# EAGLE board X04A-015-B (EAGLE 6.3)
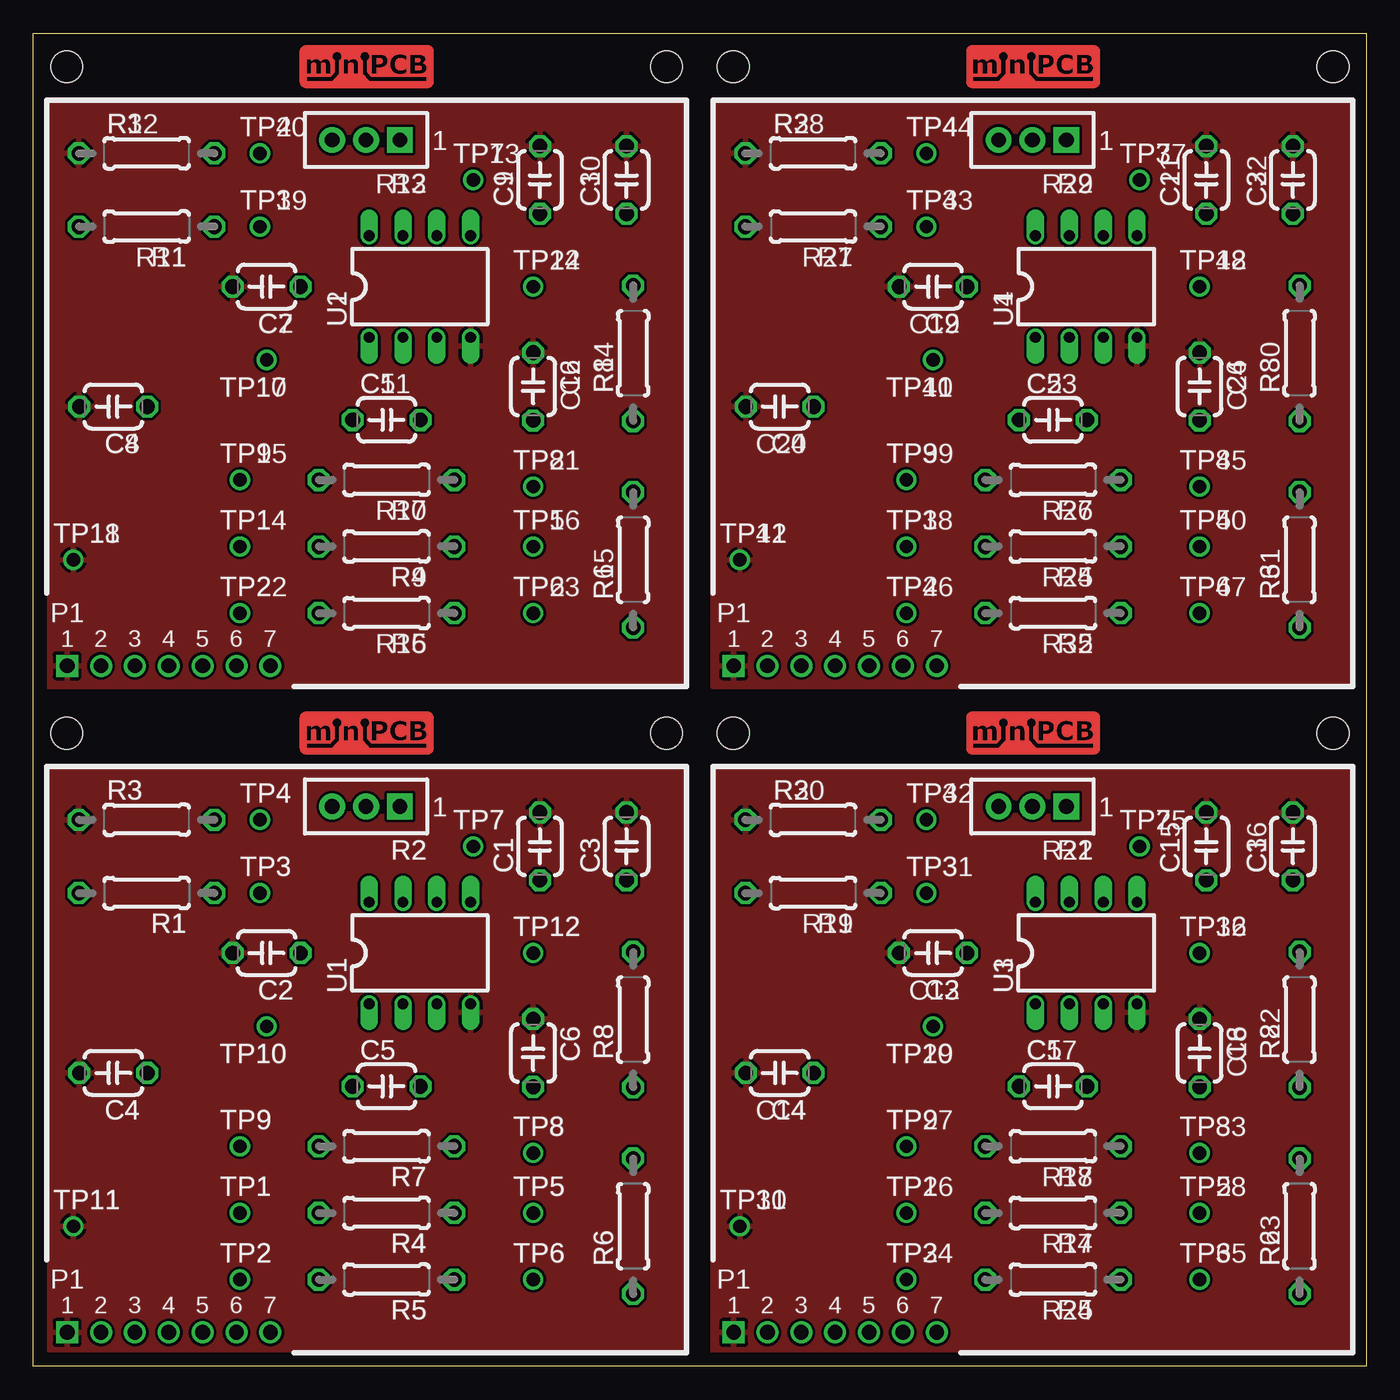
[diagram p0: board, top side]
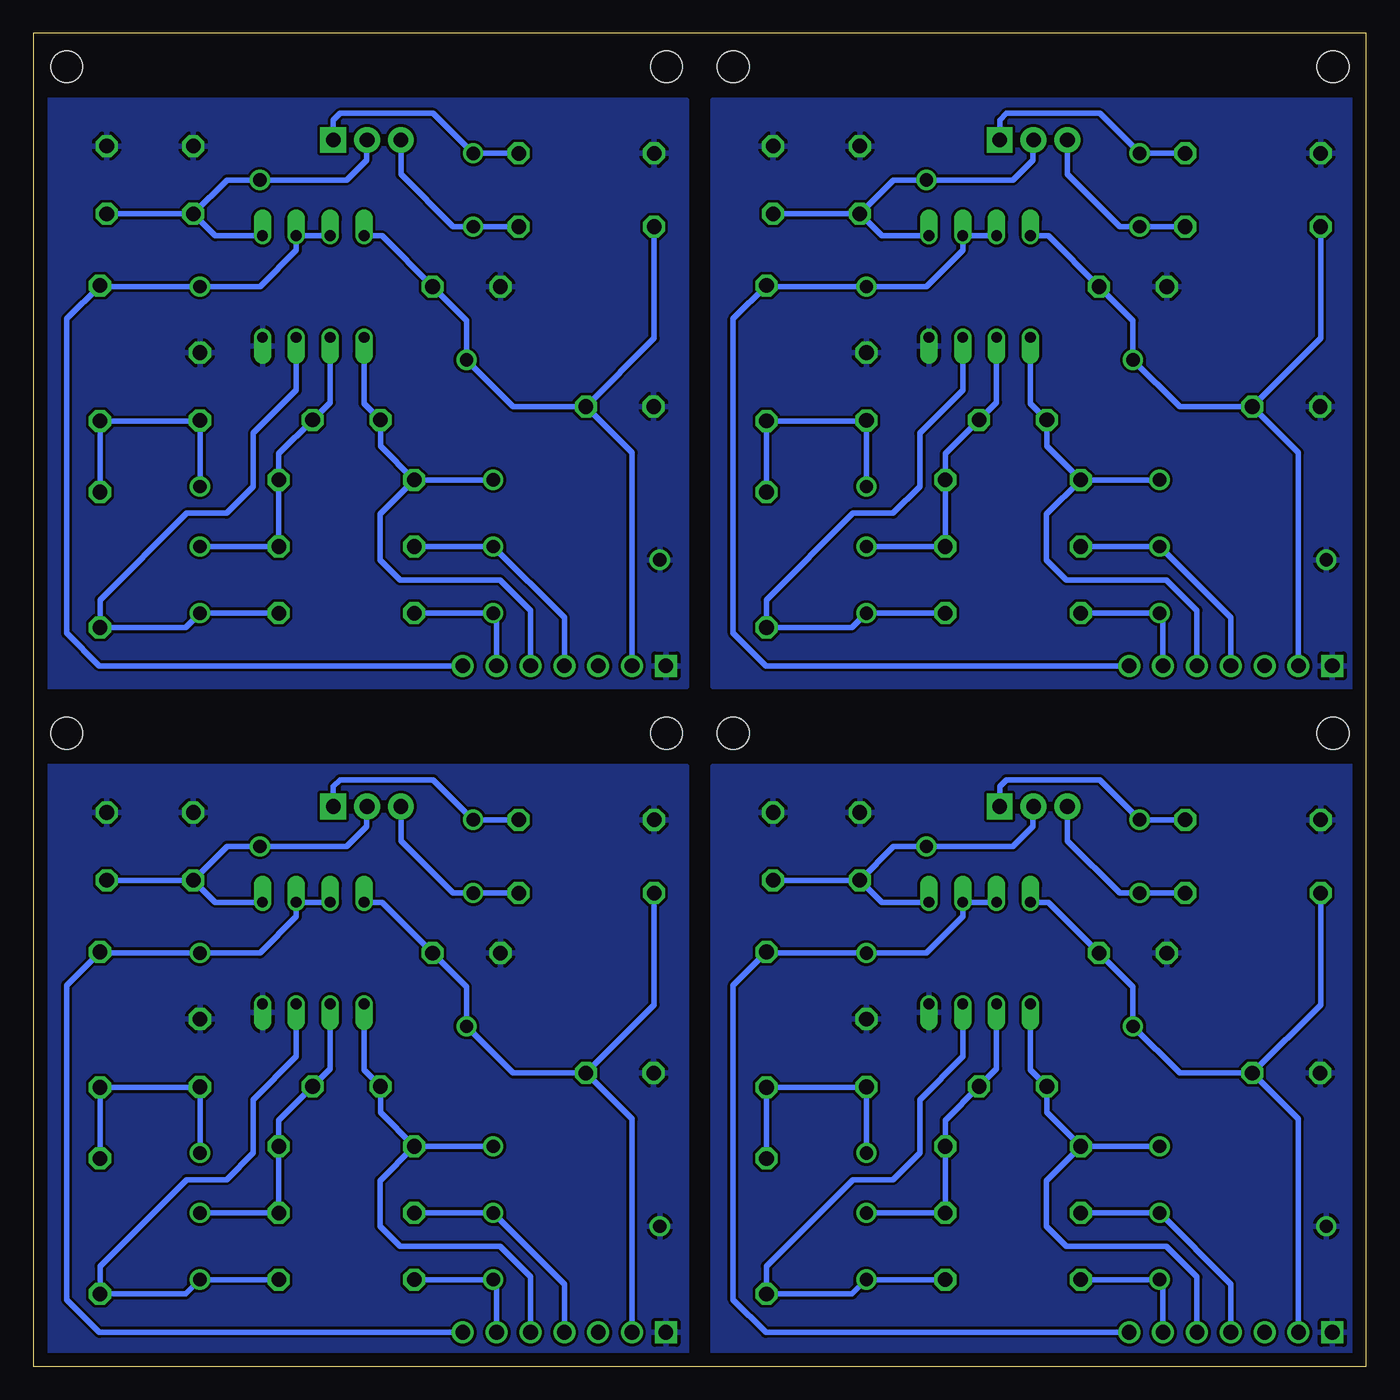
[diagram p1: board, bottom side, seen from below]

Size 100 x 100 mm. Coordinates in mm from the lower left corner, seen from the top.
Outline: 0,0 0,100 100,100 100,0 0,0
Copper layers (1*16): Top 0.035mm / dielectric 1.5mm / Bottom 0.035mm
Design rules "minipcb": minimum track width 10mil, minimum drill 24mil, track to track 8mil, track to pad 8mil, pad to pad 8mil, via to via 8mil, smd to smd 8mil, copper to edge 40mil, drill to drill 8mil, minimum pad ring 10mil, minimum via ring 8mil, stop-mask expansion 4mil, vias tented up to drill 20mil, thermal gap 10mil

## Footprints (pad centres in the part's own frame; a part is rotated, then mirrored left to right if it is on the bottom)
C050-024X044 = drill 1.1 octagon: 1 -2.54,0; 2 2.54,0
MINIPCB_7P_50X50 = drill 1.1 square: 1 2.54,2.54 | drill 1.1: 2 5.08,2.54; 3 7.62,2.54; 4 10.16,2.54; 5 12.7,2.54; 6 15.24,2.54; 7 17.78,2.54 | hole 2.4: 47.5,47.5; 2.5,47.5
0207/10 = drill 1.1 octagon: 1 -5.08,0; 2 5.08,0
TRIM_0100 = drill 1.1 pad 1.93 square: 1 0,0 | drill 1.1 pad 1.93: 2 2.54,0; 3 5.08,0
PINS_1_TESTPOINT_KE5000_NOTEXT = drill 1: 1 0,0
DIL08 = drill 0.813 offset: 1 -3.81,-3.81; 2 -1.27,-3.81; 3 1.27,-3.81; 4 3.81,-3.81; 5 3.81,3.81; 6 1.27,3.81; 7 -1.27,3.81; 8 -3.81,3.81

## Placement (x,y rotation side)
C1  [C050-024X044]  38,39 90 top
C2  [C050-024X044]  17.5,31 180 top
C3  [C050-024X044]  44.5,39 90 top
C4  [C050-024X044]  6,22 180 top
C5  [C050-024X044]  26.5,21 0 top
C6  [C050-024X044]  37.5,23.5 270 top
C7  [C050-024X044]  17.5,81 180 top
C8  [C050-024X044]  6,72 180 top
C9  [C050-024X044]  38,89 90 top
C10  [C050-024X044]  44.5,89 90 top
C11  [C050-024X044]  26.5,71 0 top
C12  [C050-024X044]  37.5,73.5 270 top
C13  [C050-024X044]  67.5,31 180 top
C14  [C050-024X044]  56,22 180 top
C15  [C050-024X044]  88,39 90 top
C16  [C050-024X044]  94.5,39 90 top
C17  [C050-024X044]  76.5,21 0 top
C18  [C050-024X044]  87.5,23.5 270 top
C19  [C050-024X044]  67.5,81 180 top
C20  [C050-024X044]  56,72 180 top
C21  [C050-024X044]  88,89 90 top
C22  [C050-024X044]  94.5,89 90 top
C23  [C050-024X044]  76.5,71 0 top
C24  [C050-024X044]  87.5,73.5 270 top
E$1  [MINIPCB_PANEL_IMAGEFRAME]  -24.13,-30.48 0 top  (outside the outline)
P1-  [MINIPCB_7P_50X50]  0,0 0 top
P1-1  [MINIPCB_7P_50X50]  0,50 0 top
P1-2  [MINIPCB_7P_50X50]  50,0 0 top
P1-3  [MINIPCB_7P_50X50]  50,50 0 top
R1  [0207/10]  8.5,35.5 180 top
R2  [TRIM_0100]  27.5,42 180 top
R3  [0207/10]  8.5,41 0 top
R4  [0207/10]  26.5,11.5 180 top
R5  [0207/10]  26.5,6.5 180 top
R6  [0207/10]  45,10.5 90 top
R7  [0207/10]  26.5,16.5 180 top
R8  [0207/10]  45,26 90 top
R9  [0207/10]  26.5,61.5 180 top
R10  [0207/10]  26.5,66.5 180 top
R11  [0207/10]  8.5,85.5 180 top
R12  [0207/10]  8.5,91 0 top
R13  [TRIM_0100]  27.5,92 180 top
R14  [0207/10]  45,76 90 top
R15  [0207/10]  45,60.5 90 top
R16  [0207/10]  26.5,56.5 180 top
R17  [0207/10]  76.5,11.5 180 top
R18  [0207/10]  76.5,16.5 180 top
R19  [0207/10]  58.5,35.5 180 top
R20  [0207/10]  58.5,41 0 top
R21  [TRIM_0100]  77.5,42 180 top
R22  [0207/10]  95,26 90 top
R23  [0207/10]  95,10.5 90 top
R24  [0207/10]  76.5,6.5 180 top
R25  [0207/10]  76.5,61.5 180 top
R26  [0207/10]  76.5,66.5 180 top
R27  [0207/10]  58.5,85.5 180 top
R28  [0207/10]  58.5,91 0 top
R29  [TRIM_0100]  77.5,92 180 top
R30  [0207/10]  95,76 90 top
R31  [0207/10]  95,60.5 90 top
R32  [0207/10]  76.5,56.5 180 top
TP1  [PINS_1_TESTPOINT_KE5000_NOTEXT]  15.5,11.5 0 top
TP2  [PINS_1_TESTPOINT_KE5000_NOTEXT]  15.5,6.5 0 top
TP3  [PINS_1_TESTPOINT_KE5000_NOTEXT]  17,35.5 0 top
TP4  [PINS_1_TESTPOINT_KE5000_NOTEXT]  17,41 0 top
TP5  [PINS_1_TESTPOINT_KE5000_NOTEXT]  37.5,11.5 0 top
TP6  [PINS_1_TESTPOINT_KE5000_NOTEXT]  37.5,6.5 0 top
TP7  [PINS_1_TESTPOINT_KE5000_NOTEXT]  33,39 0 top
TP8  [PINS_1_TESTPOINT_KE5000_NOTEXT]  37.5,16 0 top
TP9  [PINS_1_TESTPOINT_KE5000_NOTEXT]  15.5,16.5 0 top
TP10  [PINS_1_TESTPOINT_KE5000_NOTEXT]  17.5,25.5 180 top
TP11  [PINS_1_TESTPOINT_KE5000_NOTEXT]  3,10.5 0 top
TP12  [PINS_1_TESTPOINT_KE5000_NOTEXT]  37.5,31 0 top
TP13  [PINS_1_TESTPOINT_KE5000_NOTEXT]  33,89 0 top
TP14  [PINS_1_TESTPOINT_KE5000_NOTEXT]  15.5,61.5 0 top
TP15  [PINS_1_TESTPOINT_KE5000_NOTEXT]  15.5,66.5 0 top
TP16  [PINS_1_TESTPOINT_KE5000_NOTEXT]  37.5,61.5 0 top
TP17  [PINS_1_TESTPOINT_KE5000_NOTEXT]  17.5,75.5 180 top
TP18  [PINS_1_TESTPOINT_KE5000_NOTEXT]  3,60.5 0 top
TP19  [PINS_1_TESTPOINT_KE5000_NOTEXT]  17,85.5 0 top
TP20  [PINS_1_TESTPOINT_KE5000_NOTEXT]  17,91 0 top
TP21  [PINS_1_TESTPOINT_KE5000_NOTEXT]  37.5,66 0 top
TP22  [PINS_1_TESTPOINT_KE5000_NOTEXT]  15.5,56.5 0 top
TP23  [PINS_1_TESTPOINT_KE5000_NOTEXT]  37.5,56.5 0 top
TP24  [PINS_1_TESTPOINT_KE5000_NOTEXT]  37.5,81 0 top
TP25  [PINS_1_TESTPOINT_KE5000_NOTEXT]  83,39 0 top
TP26  [PINS_1_TESTPOINT_KE5000_NOTEXT]  65.5,11.5 0 top
TP27  [PINS_1_TESTPOINT_KE5000_NOTEXT]  65.5,16.5 0 top
TP28  [PINS_1_TESTPOINT_KE5000_NOTEXT]  87.5,11.5 0 top
TP29  [PINS_1_TESTPOINT_KE5000_NOTEXT]  67.5,25.5 180 top
TP30  [PINS_1_TESTPOINT_KE5000_NOTEXT]  53,10.5 0 top
TP31  [PINS_1_TESTPOINT_KE5000_NOTEXT]  67,35.5 0 top
TP32  [PINS_1_TESTPOINT_KE5000_NOTEXT]  67,41 0 top
TP33  [PINS_1_TESTPOINT_KE5000_NOTEXT]  87.5,16 0 top
TP34  [PINS_1_TESTPOINT_KE5000_NOTEXT]  65.5,6.5 0 top
TP35  [PINS_1_TESTPOINT_KE5000_NOTEXT]  87.5,6.5 0 top
TP36  [PINS_1_TESTPOINT_KE5000_NOTEXT]  87.5,31 0 top
TP37  [PINS_1_TESTPOINT_KE5000_NOTEXT]  83,89 0 top
TP38  [PINS_1_TESTPOINT_KE5000_NOTEXT]  65.5,61.5 0 top
TP39  [PINS_1_TESTPOINT_KE5000_NOTEXT]  65.5,66.5 0 top
TP40  [PINS_1_TESTPOINT_KE5000_NOTEXT]  87.5,61.5 0 top
TP41  [PINS_1_TESTPOINT_KE5000_NOTEXT]  67.5,75.5 180 top
TP42  [PINS_1_TESTPOINT_KE5000_NOTEXT]  53,60.5 0 top
TP43  [PINS_1_TESTPOINT_KE5000_NOTEXT]  67,85.5 0 top
TP44  [PINS_1_TESTPOINT_KE5000_NOTEXT]  67,91 0 top
TP45  [PINS_1_TESTPOINT_KE5000_NOTEXT]  87.5,66 0 top
TP46  [PINS_1_TESTPOINT_KE5000_NOTEXT]  65.5,56.5 0 top
TP47  [PINS_1_TESTPOINT_KE5000_NOTEXT]  87.5,56.5 0 top
TP48  [PINS_1_TESTPOINT_KE5000_NOTEXT]  87.5,81 0 top
U1  [DIL08]  29,31 0 top
U2  [DIL08]  29,81 0 top
U3  [DIL08]  79,31 0 top
U4  [DIL08]  79,81 0 top

## Library data of the parts
C1-C24 E$1 R1-R32 TP1-TP48 U1-U4 = minipcb
P1- P1-1-P1-3 = minipcb; PART_NUMBER: X04A-015-B; REVISION: B

## Nets
GND: C1.2 C2.2 C3.2 C4.2 C6.1 P1-.1 R3.1 TP11.1 U1.4
GND1: C7.2 C8.2 C9.2 C10.2 C12.1 P1-1.1 R12.1 TP18.1 U2.4
GND2: C13.2 C14.2 C15.2 C16.2 C18.1 P1-2.1 R20.1 TP30.1 U3.4
GND3: C19.2 C20.2 C21.2 C22.2 C24.1 P1-3.1 R28.1 TP42.1 U4.4
IN: P1-.4 R4.2 TP1.1
IN1: P1-1.4 R9.2 TP14.1
IN2: P1-2.4 R17.2 TP26.1
IN3: P1-3.4 R25.2 TP38.1
N$1: C1.1 C3.1 R2.2 TP7.1 U1.5
N$2: C6.2 R6.2 R8.1 TP8.1
N$3: R5.1 R6.1 TP6.1 U1.3
N$4: P1-.6 R5.2 TP2.1
N$5: C9.1 C10.1 R13.2 TP13.1 U2.5
N$6: C12.2 R14.1 R15.2 TP21.1
N$7: R15.1 R16.1 TP23.1 U2.3
N$8: P1-1.6 R16.2 TP22.1
N$9: C15.1 C16.1 R21.2 TP25.1 U3.5
N$10: C18.2 R22.1 R23.2 TP33.1
N$11: R23.1 R24.1 TP35.1 U3.3
N$12: P1-2.6 R24.2 TP34.1
N$13: C21.1 C22.1 R29.2 TP37.1 U4.5
N$14: C24.2 R30.1 R31.2 TP45.1
N$15: R31.1 R32.1 TP47.1 U4.3
N$16: P1-3.6 R32.2 TP46.1
NC: P1-.3
NC1: P1-1.3
NC2: P1-2.3
NC3: P1-3.3
OUT: C5.1 P1-.5 R7.2 TP9.1 U1.1
OUT1: C11.1 P1-1.5 R10.2 TP15.1 U2.1
OUT2: C17.1 P1-2.5 R18.2 TP27.1 U3.1
OUT3: C23.1 P1-3.5 R26.2 TP39.1 U4.1
P1.1: R2.1 R3.2 TP4.1
P1.2: R11.1 R13.3 TP19.1
P1.3: R1.1 R2.3 TP3.1
P1.4: R12.2 R13.1 TP20.1
P1.5: R19.1 R21.3 TP31.1
P1.6: R20.2 R21.1 TP32.1
P1.7: R27.1 R29.3 TP43.1
P1.8: R28.2 R29.1 TP44.1
V+: C2.1 C4.1 P1-.2 R1.2 TP10.1 U1.8
V+1: C7.1 C8.1 P1-1.2 R11.2 TP17.1 U2.8
V+2: C13.1 C14.1 P1-2.2 R19.2 TP29.1 U3.8
V+3: C19.1 C20.1 P1-3.2 R27.2 TP41.1 U4.8
VFB: C5.2 R4.1 R7.1 TP5.1 U1.2
VFB1: C11.2 R9.1 R10.1 TP16.1 U2.2
VFB2: C17.2 R17.1 R18.1 TP28.1 U3.2
VFB3: C23.2 R25.1 R26.1 TP40.1 U4.2
VREF: P1-.7 R8.2 TP12.1 U1.6 U1.7
VREF1: P1-1.7 R14.2 TP24.1 U2.6 U2.7
VREF2: P1-2.7 R22.2 TP36.1 U3.6 U3.7
VREF3: P1-3.7 R30.2 TP48.1 U4.6 U4.7

## Tracks (layer width: path | path; a pad name or v marks a point on that pad's centre or on a via)
GND
  pour Top: 1,1 49,1 49,45 1,45
  pour Bottom: 1,1 49,1 49,45 1,45
GND1
  pour Top: 1,51 49,51 49,95 1,95
  pour Bottom: 1,51 49,51 49,95 1,95
GND2
  pour Top: 51,1 99,1 99,45 51,45
  pour Bottom: 51,1 99,1 99,45 51,45
GND3
  pour Top: 51,51 99,51 99,95 51,95
  pour Bottom: 51,51 99,51 99,95 51,95
IN
  Bottom 0.406: R4.2 TP1.1 10.16,6.16 P1-.4
IN1
  Bottom 0.406: R9.2 TP14.1 10.16,56.16 P1-1.4
IN2
  Bottom 0.406: R17.2 TP26.1 60.16,6.16 P1-2.4
IN3
  Bottom 0.406: R25.2 TP38.1 60.16,56.16 P1-3.4
N$1
  Bottom 0.406: R2.2 25,41.96 25,40.5 26.5,39 TP7.1 35.46,39 C1.1 | U1.5 36.35,34.81 C1.1 | C3.1 C1.1
N$2
  Bottom 0.406: R6.2 R8.1 37.54,20.92 C6.2 TP8.1
N$3
  Bottom 0.406: R5.1 TP6.1 38.58,5.42 R6.1 45,7.5 38.5,14 35.5,14 33.5,16 33.5,20 30.27,23.23 U1.3
N$4
  Bottom 0.406: P1-.6 15.24,6.24 TP2.1 R5.2
N$5
  Bottom 0.406: R13.2 25,91.96 25,90.5 26.5,89 TP13.1 35.46,89 C9.1 | U2.5 36.35,84.81 C9.1 | C10.1 C9.1
N$6
  Bottom 0.406: R15.2 R14.1 37.54,70.92 C12.2 TP21.1
N$7
  Bottom 0.406: R16.1 TP23.1 38.58,55.42 R15.1 45,57.5 38.5,64 35.5,64 33.5,66 33.5,70 30.27,73.23 U2.3
N$8
  Bottom 0.406: P1-1.6 15.24,56.24 TP22.1 R16.2
N$9
  Bottom 0.406: R21.2 75,41.96 75,40.5 76.5,39 TP25.1 85.46,39 C15.1 | U3.5 86.35,34.81 C15.1 | C16.1 C15.1
N$10
  Bottom 0.406: R23.2 R22.1 87.54,20.92 C18.2 TP33.1
N$11
  Bottom 0.406: R24.1 TP35.1 88.58,5.42 R23.1 95,7.5 88.5,14 85.5,14 83.5,16 83.5,20 80.27,23.23 U3.3
N$12
  Bottom 0.406: P1-2.6 65.24,6.24 TP34.1 R24.2
N$13
  Bottom 0.406: R29.2 75,91.96 75,90.5 76.5,89 TP37.1 85.46,89 C21.1 | U4.5 86.35,84.81 C21.1 | C22.1 C21.1
N$14
  Bottom 0.406: R31.2 R30.1 87.54,70.92 C24.2 TP45.1
N$15
  Bottom 0.406: R32.1 TP47.1 88.58,55.42 R31.1 95,57.5 88.5,64 85.5,64 83.5,66 83.5,70 80.27,73.23 U4.3
N$16
  Bottom 0.406: P1-3.6 65.24,56.24 TP46.1 R32.2
OUT
  Bottom 0.406: U1.1 25.19,22.23 C5.1 23.96,19.04 R7.2 | R7.2 TP9.1 | P1-.5 12.7,6.7 15,9 22.5,9 24,10.5 24,13.92 R7.2
OUT1
  Bottom 0.406: U2.1 25.19,72.23 C11.1 23.96,69.04 R10.2 | R10.2 TP15.1 | P1-1.5 12.7,56.7 15,59 22.5,59 24,60.5 24,63.92 R10.2
OUT2
  Bottom 0.406: U3.1 75.19,22.23 C17.1 73.96,19.04 R18.2 | R18.2 TP27.1 | P1-2.5 62.7,6.7 65,9 72.5,9 74,10.5 74,13.92 R18.2
OUT3
  Bottom 0.406: U4.1 75.19,72.23 C23.1 73.96,69.04 R26.2 | R26.2 TP39.1 | P1-3.5 62.7,56.7 65,59 72.5,59 74,60.5 74,63.92 R26.2
P1.1
  Bottom 0.406: R3.2 TP4.1 20,44 27,44 27.5,43.5 R2.1
P1.2
  Bottom 0.406: R11.1 TP19.1 18.5,85.5 22.42,89.42 R13.3
P1.3
  Bottom 0.406: R1.1 TP3.1 18.5,35.5 22.42,39.42 R2.3
P1.4
  Bottom 0.406: R12.2 TP20.1 20,94 27,94 27.5,93.5 R13.1
P1.5
  Bottom 0.406: R19.1 TP31.1 68.5,35.5 72.42,39.42 R21.3
P1.6
  Bottom 0.406: R20.2 TP32.1 70,44 77,44 77.5,43.5 R21.1
P1.7
  Bottom 0.406: R27.1 TP43.1 68.5,85.5 72.42,89.42 R29.3
P1.8
  Bottom 0.406: R28.2 TP44.1 70,94 77,94 77.5,93.5 R29.1
V+
  Bottom 0.406: P1-.2 5.08,18.54 C4.1 | U1.8 23.85,34.81 C2.1 17.5,28.46 TP10.1 14,22 C4.1 | C4.1 3.42,27.12 R1.2
V+1
  Bottom 0.406: P1-1.2 5.08,68.54 C8.1 | U2.8 23.85,84.81 C7.1 17.5,78.46 TP17.1 14,72 C8.1 | C8.1 3.42,77.12 R11.2
V+2
  Bottom 0.406: P1-2.2 55.08,18.54 C14.1 | U3.8 73.85,34.81 C13.1 67.5,28.46 TP29.1 64,22 C14.1 | C14.1 53.42,27.12 R19.2
V+3
  Bottom 0.406: P1-3.2 55.08,68.54 C20.1 | U4.8 73.85,84.81 C19.1 67.5,78.46 TP41.1 64,72 C20.1 | C20.1 53.42,77.12 R27.2
VFB
  Bottom 0.406: TP5.1 R4.1 R7.1 31.58,18.46 C5.2 27.73,22.31 U1.2
VFB1
  Bottom 0.406: TP16.1 R9.1 R10.1 31.58,68.46 C11.2 27.73,72.31 U2.2
VFB2
  Bottom 0.406: TP28.1 R17.1 R18.1 81.58,18.46 C17.2 77.73,22.31 U3.2
VFB3
  Bottom 0.406: TP40.1 R25.1 R26.1 81.58,68.46 C23.2 77.73,72.31 U4.2
VREF
  Bottom 0.406: U1.7 U1.6 30.27,33.73 33,31 TP12.1 44.92,31 R8.2 47.5,28.58 47.5,5 45.04,2.54 P1-.7
VREF1
  Bottom 0.406: U2.7 U2.6 30.27,83.73 33,81 TP24.1 44.92,81 R14.2 47.5,78.58 47.5,55 45.04,52.54 P1-1.7
VREF2
  Bottom 0.406: U3.7 U3.6 80.27,33.73 83,31 TP36.1 94.92,31 R22.2 97.5,28.58 97.5,5 95.04,2.54 P1-2.7
VREF3
  Bottom 0.406: U4.7 U4.6 80.27,83.73 83,81 TP48.1 94.92,81 R30.2 97.5,78.58 97.5,55 95.04,52.54 P1-3.7

## Text on the board
_tNames: R3 | TP4 | R3 | TP4 | TP7 | TP7 | R2 | R2 | TP3 | C1 | C3 | TP3 | C1 | C3 | R1 | R1 | TP12 | TP12 | C2 | C2 | U1 | U1 | C6 | C6 | TP10 | TP10 | C5 | R8 | C5 | R8 | C4 | C4 | TP9 | TP9 | TP8 | TP8 | R7 | R7 | TP1 | TP5 | TP1 | TP5 | TP11 | TP11 | R4 | R4 | TP2 | TP6 | R6 | TP2 | TP6 | R6 | R5 | R5 | R3 | TP4 | R3 | TP4 | TP7 | TP7 | R2 | R2 | TP3 | C1 | C3 | TP3 | C1 | C3 | R1 | R1 | TP12 | TP12 | C2 | C2 | U1 | U1 | C6 | C6 | TP10 | TP10 | C5 | R8 | C5 | R8 | C4 | C4 | TP9 | TP9 | TP8 | TP8 | R7 | R7 | TP1 | TP5 | TP1 | TP5 | TP11 | TP11 | R4 | R4 | TP2 | TP6 | R6 | TP2 | TP6 | R6 | R5 | R5